# Altium PCB Raspberry Pi 31_2020-06-05_10-56-49.pcbdoc
Units mil, origin at the board's own origin, x right, y up, seen from the top; angles counter-clockwise.
Board outline 4367.66 x 3283.87 mil, 2 copper layers (Top Layer, Bottom Layer); 14 components, 8 nets, 142 pads, 0 vias.
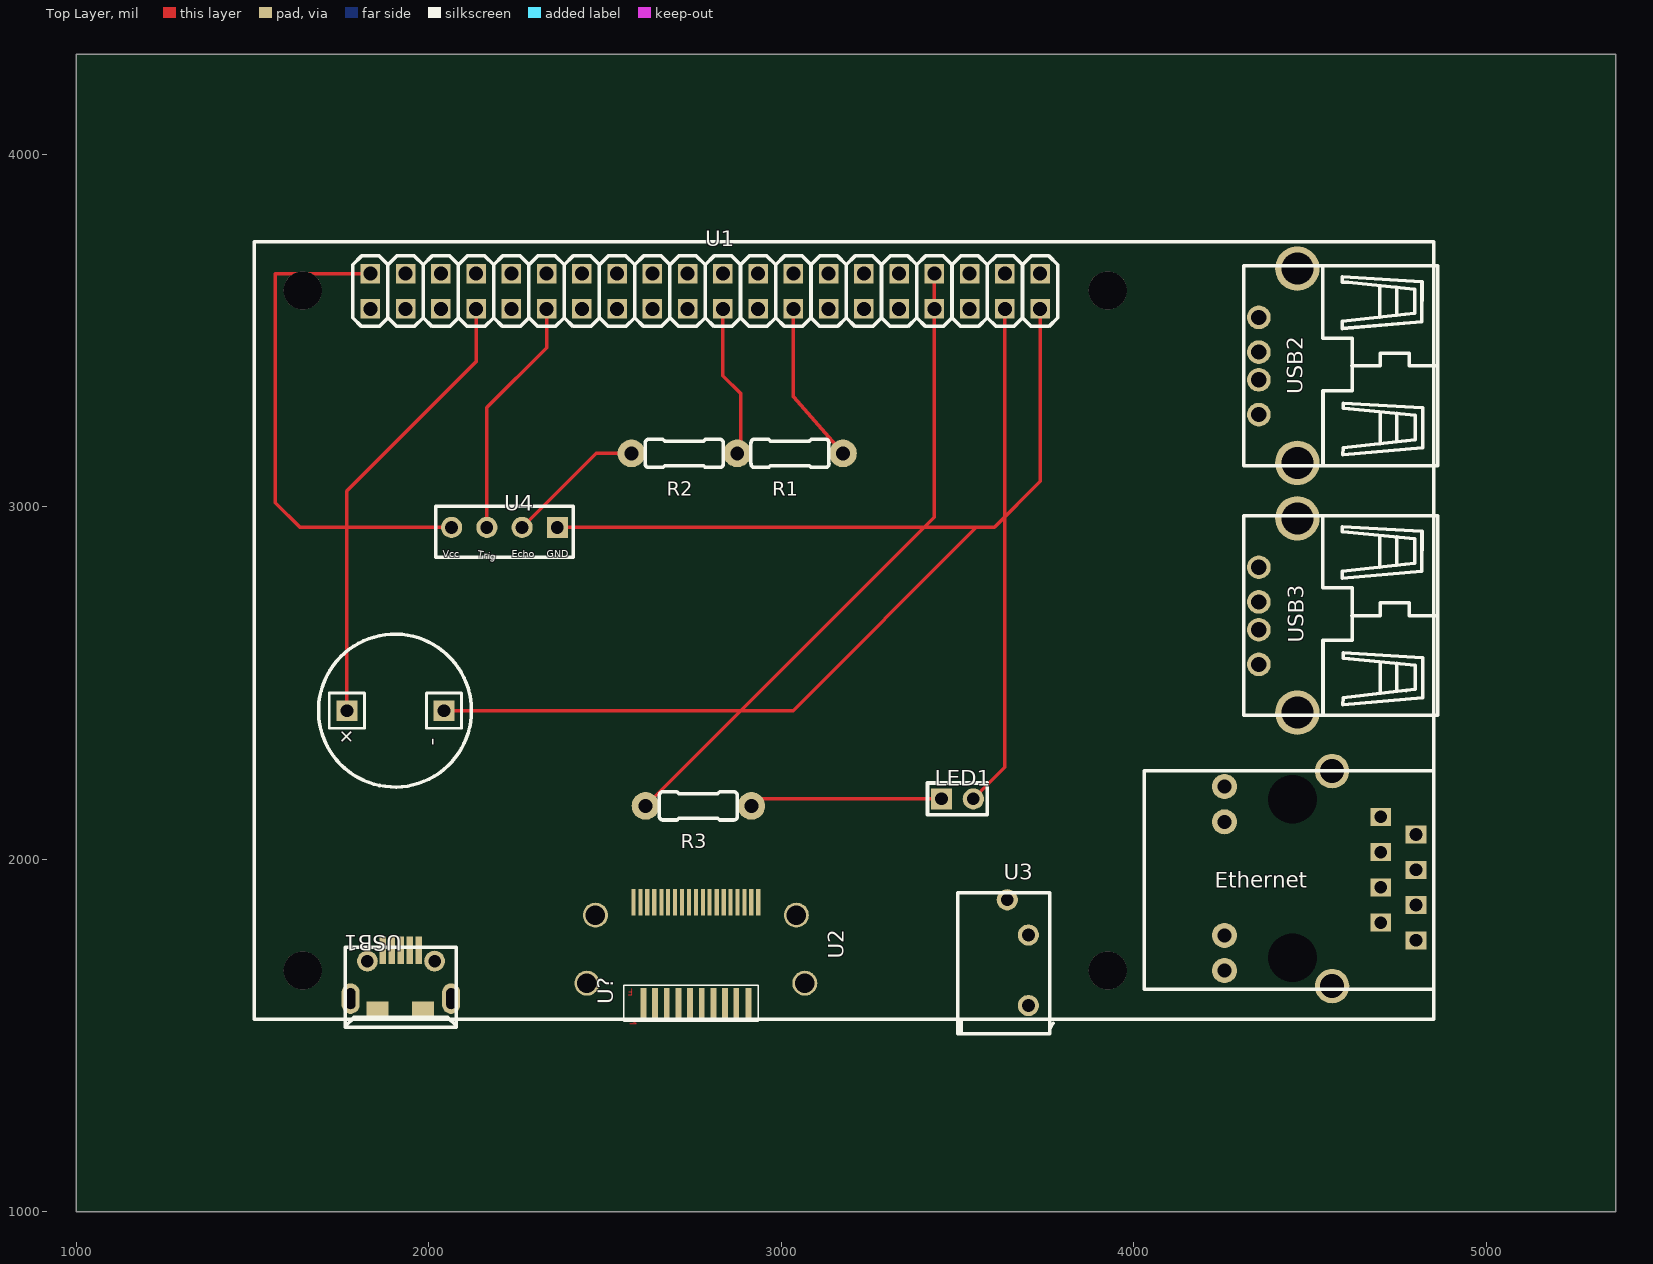
[diagram p0: Top Layer view]
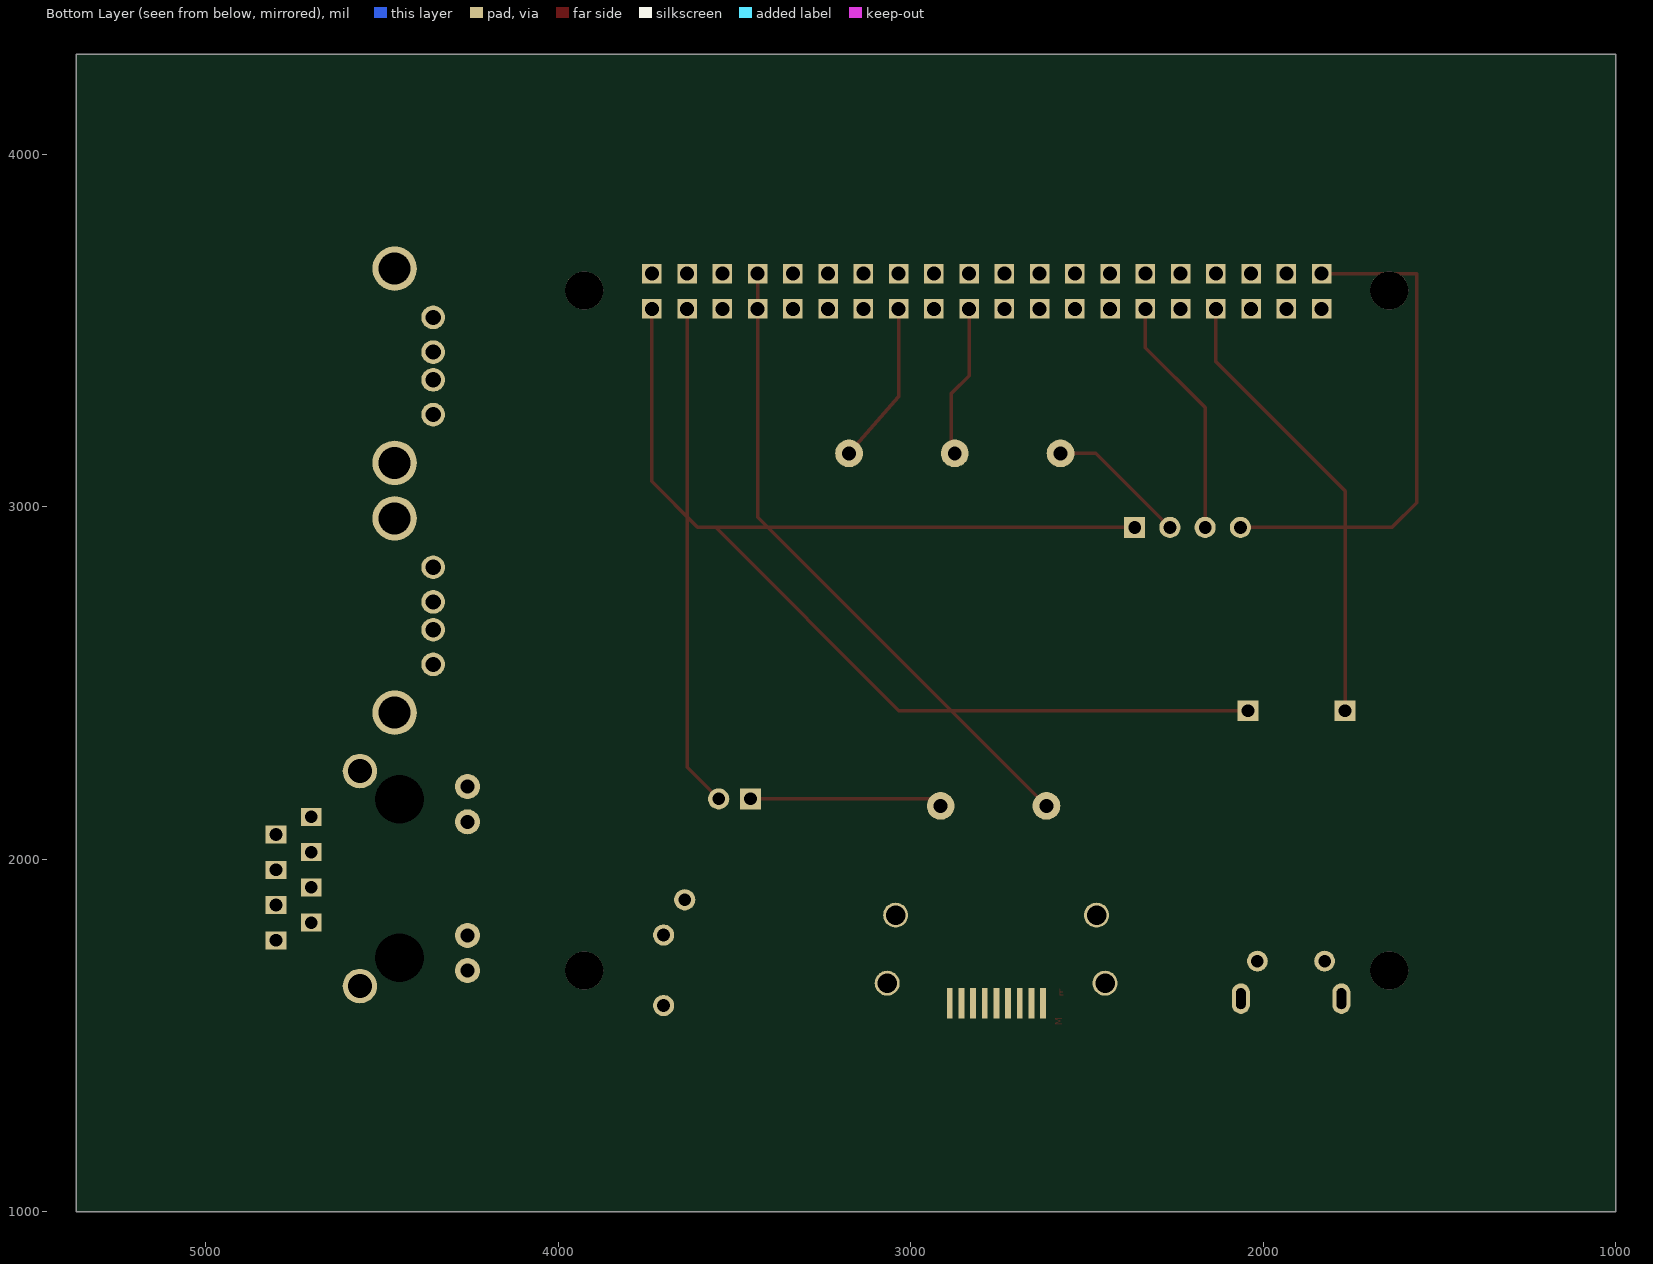
[diagram p1: Bottom Layer view, seen from below]

## Layer stack, top to bottom
Top Layer: signal copper (thickness not stored)
Dielectric: dielectric 12.6, FR-4, Dk 4.8
Bottom Layer: signal copper (thickness not stored)

## Board outline
5367.66,1000 1000,1000 1000,4283.87 5367.66,4283.87

## Components (designator, comment, footprint, x,y, rotation, side; value= is the part's Value field where it differs from the comment)
+ "_" ?#1 1765.26,2422.37 r180 top
- "_" ?#2 2041.66,2422.27 r180 top
Ethernet "RJ45" ?#3 4530.58,1950.19 r90 top
R1 "100K" ?#4 3025,3151.37 r0 top
R2 "100K" ?#4 2725,3151.37 r0 top
R3 "100K" ?#4 2765,2151.37 r0 top
U1 "2X20" 2X20 2784.53,3611.37 r0 top
U2 "HDMI Type A" "HDMI Type A" 2765,1678.54 r270 top
U3 "TruConnect 3.5mm Jack Socket" "TruConnect 3.5mm Jack Socket" 3611.3,1775 r0 top
U4 "ULTRASONIC SENSOR" "ULTRASONIC SENSOR" 2265,2941.37 r0 top
U? "UHDMI8MM" UHDMI8MM 2605,1551.37 r90 top
USB1 "MICRO-USB-1" MICRO-USB-1 1922.32,1651.37 r270 top
USB2 "USB-M-1" USB-M-1 4355,3397.04 r0 top
USB3 "USB-M-1" USB-M-1 4355,2688.38 r0 top

## Footprints (in the part's own frame and the unit in brackets; to place one, negate y for a bottom-side part, rotate by r counter-clockwise, add the part's x,y. Pads: shape width x height; smd on the part's side, far side on the other; paste and mask are expansions set on the pad)
2X20 [mil]
  rect 55.7x55.7 hole 40: 1(-950,-50) 2(-950,50) 3(-850,-50) 4(-850,50) 5(-750,-50) 6(-750,50) 7(-649.99,-50) 8(-649.99,50) 9(-549.99,-50) 10(-549.99,50) 11(-449.99,-50) 12(-449.99,50) 13(-349.99,-50) 14(-349.99,50) 15(-249.99,-50) 16(-249.99,50) 17(-149.99,-50) 18(-149.99,50) 19(-49.99,-50) 20(-49.99,50) 21(50.01,-50) 22(50.01,50) 23(150.01,-50) 24(150.01,50) 25(250.01,-50) 26(250.01,50) 27(350.01,-50) 28(350.01,50) 29(450.01,-50) 30(450.01,50) 31(550.01,-50) 32(550.01,50) 33(650.01,-50) 34(650.01,50) 35(750.01,-50) 36(750.01,50) 37(850.01,-50) 38(850.01,50) 39(950.01,-50) 40(950.01,50)
  silkscreen extent -1000,-100 1000,100
"HDMI Type A" [mil]
  rect 74.8x11.8 smd: 1(-200,170) 2(-200,150) 3(-200,131) 4(-200,111) 5(-200,91) 6(-200,72) 7(-200,52) 8(-200,32) 9(-200,13) 10(-200,-7) 11(-200,-27) 12(-200,-46) 13(-200,-66) 14(-200,-86) 15(-200,-105) 16(-200,-125) 17(-200,-145) 18(-200,-164) 19(-200,-184)
  round 70.9 hole 55.2: 20(30.07,-316) 21(-162.93,-292) 22(-162.93,278) 23(30.07,302)
  silkscreen extent 132,-322 132,308
MICRO-USB-1 [mm]
  round 1.5 hole 0.9: 0(-1.516,2.4) 0(-1.516,-2.441)
  oval 2.199x1.3 hole 0.7 slot 1.5 at 0 deg copper offset 0,0.001: 0(1.184,3.589) 0(1.184,-3.65)
  rect 1.2x1.6 smd: 0(1.995,-1.714) 0(2.011,1.565)
  rect 2x0.45 smd: 1(-2.301,-1.341) 2(-2.301,-0.691) 3(-2.301,-0.041) 4(-2.301,0.609) 5(-2.301,1.259)
  silkscreen extent -2.51,-4.03 3.25,3.97
"TruConnect 3.5mm Jack Socket" [mil]
  round 60 hole 36: 5(30.01,110.07) 6(90.01,10.07) 7(90.01,-189.93)
  silkscreen extent -110,-270 160,130
UHDMI8MM [mil]
  rect 86.61x16.54 smd: 1(40.01,-4.26) 3(40.01,-37.33) 17(40.01,-267.3) 19(40.01,-301.9)
  rect 86.61x16.54 smd far side: 2(40.01,-20.01) 4(40.01,-53.08) 6(40.01,-86.15) 8(40.01,-119.22) 10(40.01,-152.29)
  rect 86.61x16.53 smd: 5(40.01,-70.4) 7(40.01,-103.47) 9(40.01,-136.54) 11(40.01,-169.62) 13(40.01,-202.69) 15(40.01,-235.76)
  rect 86.61x16.53 smd far side: 12(40.01,-185.36) 14(40.01,-218.43) 16(40.01,-251.51) 18(40.01,-284.58)
  silkscreen extent -11,-330 91,52
"ULTRASONIC SENSOR" [mil]
  round 60 hole 36: 1(-200,0) 2(-100,0) 3(0,0)
  rect 60x60 hole 36: 4(100,0)
  silkscreen extent -245,-85 145,60
USB-M-1 [mm]
  round 3.2 hole 2.3: 0(2.771,-6.923) 0(2.771,7.077)
  round 1.7 hole 1.1: 1(0,3.557) 2(0,1.057) 3(0,-0.942) 4(0,-3.443)
  silkscreen extent -1.11,-7.12 12.89,7.28
?#1 [mil]
  rect 59x59 hole 36: 1(-2.87,0.84)
  silkscreen extent -53,-49 47,51
?#2 [mil]
  rect 59x59 hole 36: 1(-1.85,0.81)
  silkscreen extent -52,-49 48,51
?#3 [mil]
  rect 51x59 hole 36: 1(170,-170) 2(120,-270) 3(70,-170) 4(20,-270) 5(-30,-170) 6(-80,-270) 7(-130,-170) 8(-180,-270)
  round 71 hole 40: 9(255.98,272.98) 10(155.98,272.98) 11(-166.02,272.98) 12(-266.02,272.98)
  round 98 hole 68: 13(299.98,-32.02) 14(-310.02,-32.02)
  round 79 hole 138: 15(-230.02,79.98) 16(219.98,79.98)
  silkscreen extent -319,-320 301,500
?#4 [mil]
  round 78.7 hole 39.4: 1(-149.7,0.1) 2(150.3,0.1)
  silkscreen extent -111,-40 111,40

## Free pads (board coordinates)
  rect 60x60 hole 36: 1(3455,2171.37)
  round 60 hole 36: 2(3545,2171.37)
  round 108.26 hole 108.26 unplated: ""(1642.8,1684.47) ""(1642.8,3613.57) ""(3926.3,1684.47) ""(3926.3,3613.57)

## Nets (pads, with @x,y where several pads share a name; then routed paths per layer and width w, separated by ;. In a path a pad name is that pad's centre, name@x,y a point inside that pad or via, vN(x,y) a via of type N, cw(c..) or ccw(c..) an arc to the next point about the centre after c; other vN are vias at no path point)
+9V: pad.1 R1.2 R2.2 R3.2 U1.21 | length 982.8
  Top Layer w10: U1.21 2834.53,3371.84 2885,3321.37 2885,3161.17 R2.2 ; R3.2 2935.2,2171.37 pad.1
N$5: pad.2 R1.1 R2.1 R3.1 U1.31 U1.34 U1.37 U4.3 | length 3673.6
  Top Layer w10: U4.3 2475.1,3151.47 R2.1 ; R3.1 3434.5,2970.67 U1.34 ; pad.2 3634.5,2260.87 U1.37
S$64: 
S$654: -.1 U1.39 U4.4 | length 3639
  Top Layer w10: -.1 3033.9,2421.47 3553.8,2941.37 ; U4.4 3605,2941.37 3734.5,3071.87 U1.39
S$660: U1.2 U4.1 | length 1448.5
  Top Layer w10: U1.2 1565,3661.37 1565,3011.37 1635,2941.37 U4.1
S$664: U1.11 U4.2 | length 690.2
  Top Layer w10: U4.2 2165,3281.37 2334.53,3450.9 U1.11
S$666: U1.25 | length 462.9
  Top Layer w10: U1.25 3034.53,3311.84 3175.3,3151.47
S$777: +.1 U1.7 | length 1291.3
  Top Layer w10: +.1@1768.1,2421.57 1768.1,3044.47 2134.5,3411.87 U1.7
pads on no net: Ethernet.1 Ethernet.2 Ethernet.3 Ethernet.4 Ethernet.5 Ethernet.6 Ethernet.7 Ethernet.8 Ethernet.9 Ethernet.10 Ethernet.11 Ethernet.12 Ethernet.13 Ethernet.14 Ethernet.15 Ethernet.16 U1.1 U1.3 U1.4 U1.5 U1.6 U1.8 U1.9 U1.10 U1.12 U1.13 U1.14 U1.15 U1.16 U1.17 U1.18 U1.19 U1.20 U1.22 U1.23 U1.24 U1.26 U1.27 U1.28 U1.29 U1.30 U1.32 U1.33 U1.35 U1.36 U1.38 U1.40 U2.1 U2.2 U2.3 U2.4 U2.5 U2.6 U2.7 U2.8 U2.9 U2.10 U2.11 U2.12 U2.13 U2.14 U2.15 U2.16 U2.17 U2.18 U2.19 U2.20 U2.21 U2.22 U2.23 U3.5 U3.6 U3.7 U?.1 U?.2 U?.3 U?.4 U?.5 U?.6 U?.7 U?.8 U?.9 U?.10 U?.11 U?.12 U?.13 U?.14 U?.15 U?.16 U?.17 U?.18 U?.19 USB1.0 USB1.1 USB1.2 USB1.3 USB1.4 USB1.5 USB2.0 USB2.1 USB2.2 USB2.3 USB2.4 USB3.0 USB3.1 USB3.2 USB3.3 USB3.4

## Silkscreen, mask and mechanical layers (free items; w line width, h text height)
Top Overlay:
  circle w10: c1904.3,2421.67 r216.9
  lines w10: 1505,1546.65 1505,3751.37 4851.45,3751.37 4851.45,1546.65 1505,1546.65
  lines w10 net S$64: 3415,2126.37 3585,2126.37 3585,2216.37 3415,2216.37 3415,2126.37
  text "LED1" at 3435,2208.87 h45

## Text inside footprints (layer, text, board x,y; h text height)
U4: Top Overlay "Vcc" at 2040,2856.53 h19.68; Top Overlay "Trig" at 2138.29,2856.68 h19.68 r350; Top Overlay "Echo" at 2235,2856.53 h19.68; Top Overlay "GND" at 2335,2856.53 h19.68
U?: Top Layer "F" at 2580.9,1632.71 h19.68 r180; Top Layer "M" at 2571.06,1551.97 h19.68 r270